# EAGLE board ProjetoIOT (EAGLE 9.7.0)

Size 175.35 x 120.71 mm. Coordinates in mm from the lower left corner, seen from the top.
Outline: 0,0 175.35,0 175.35,120.71 0,120.71 0,0
Copper layers (1*16): Top 0.035mm / dielectric 1.5mm / Bottom 0.035mm
Design rules "default": minimum track width 6mil, minimum drill 0.35mm, track to track 6mil, track to pad 6mil, pad to pad 6mil, via to via 6mil, smd to smd 6mil, copper to edge 40mil, drill to drill 6mil, minimum pad ring 10mil, minimum via ring 8mil, stop-mask expansion 4mil, vias tented up to drill 0mil, thermal gap 10mil

## Footprints (pad centres in the part's own frame; a part is rotated, then mirrored left to right if it is on the bottom)
PIEZO = drill 1 pad 1.6: 1 -3.5,0; 2 3.5,0
RESAD1016W63L850D250B = drill 0.83 pad 1.43: 1 -5.08,0; 2 5.08,0
HA-06-SM065 = drill 1 pad 1.676: 1 -2.54,-2.54; 2 0,2.54; 3 2.54,-2.54
SWITCH-MOMENTARY-PTH-6.5MM = drill 1.016 pad 1.88: 1 -3.251,2.261; 2 3.251,2.261; 3 -3.251,-2.261; 4 3.251,-2.261
ARDUINO-UNO-R3-SHIELD = drill 1.016 pad 1.88: 3.3V 24.13,-2.54; 5V 24.13,0; A0 24.13,12.7; A1 24.13,15.24; A2 24.13,17.78; A3 24.13,20.32; A4 24.13,22.86; A5 24.13,25.4; AREF -24.13,-13.97; D2 -24.13,20.32; D3 -24.13,17.78; D4 -24.13,15.24; D5 -24.13,12.7; D6 -24.13,10.16; D7 -24.13,7.62; D8 -24.13,3.81; D9 -24.13,1.27; D10 -24.13,-1.27; D11 -24.13,-3.81; D12 -24.13,-6.35; D13 -24.13,-8.89; GND@0 24.13,2.54; GND@1 24.13,5.08; GND@2 -24.13,-11.43; IOREF 24.13,-7.62; NC 24.13,-10.16; RES 24.13,-5.08; RX -24.13,25.4; SCL -24.13,-19.05; SDA -24.13,-16.51; TX -24.13,22.86; VIN 24.13,7.62
JHD-162A = drill 1.016 long: 1 -19.05,0; 2 -16.51,0; 3 -13.97,0; 4 -11.43,0; 5 -8.89,0; 6 -6.35,0; 7 -3.81,0; 8 -1.27,0; 9 1.27,0; 10 3.81,0; 11 6.35,0; 12 8.89,0; 13 11.43,0; 14 13.97,0; 15 16.51,0; 16 19.05,0

## Placement (x,y rotation side)
PIEZO1  PIEZO  [PIEZO]  112.49,103.44 180 top
R1  220  [RESAD1016W63L850D250B]  121.38,70.42 270 top
R2  1k  [RESAD1016W63L850D250B]  108.68,72.96 90 top
RPOT2  250k  [HA-06-SM065]  129,78.04 0 top
S1  SWITCH_MOMENTARY  [SWITCH-MOMENTARY-PTH-6.5MM]  159.48,89.47 90 top
S2  SWITCH_MOMENTARY  [SWITCH-MOMENTARY-PTH-6.5MM]  167.1,89.47 90 top
U2  ARDUINO-UNO-R3-SHIELD  [ARDUINO-UNO-R3-SHIELD]  48.27,90.86 270 top
U3  LCD-16X2JHD-162A  [JHD-162A]  30.73,36.63 0 top

## Library data of the parts
PIEZO1 R1 R2 RPOT2 S1 S2 U2 U3 = Tinkercad

## Nets
U2_5V: R1.2 RPOT2.1 U2.5V U3.2
U2_A0: RPOT2.2 U2.A0
U2_D2: S1.3 S1.4 U2.D2
U2_D3: S2.3 S2.4 U2.D3
U2_D4: U2.D4 U3.14
U2_D5: U2.D5 U3.13
U2_D6: U2.D6 U3.12
U2_D7: U2.D7 U3.11
U2_D8: PIEZO1.1 U2.D8
U2_D11: U2.D11 U3.6
U2_D12: U2.D12 U3.4
U2_GND: PIEZO1.2 R2.1 RPOT2.3 S1.1 S1.2 S2.1 S2.2 U2.GND@0 U2.GND@1 U2.GND@2 U3.1 U3.5 U3.16
U3_LED+: R1.1 U3.15
U3_VO: R2.2 U3.3

## Tracks (layer width: path | path; a pad name or v marks a point on that pad's centre or on a via)
U2_5V  (3 unrouted)
U2_A0  (1 unrouted)
U2_D2  (2 unrouted)
U2_D3  (2 unrouted)
U2_D4  (1 unrouted)
U2_D5  (1 unrouted)
U2_D6  (1 unrouted)
U2_D7  (1 unrouted)
U2_D8  (1 unrouted)
U2_D11  (1 unrouted)
U2_D12  (1 unrouted)
U2_GND  (12 unrouted)
U3_LED+  (1 unrouted)
U3_VO  (1 unrouted)